# Allegro board democ2.brd
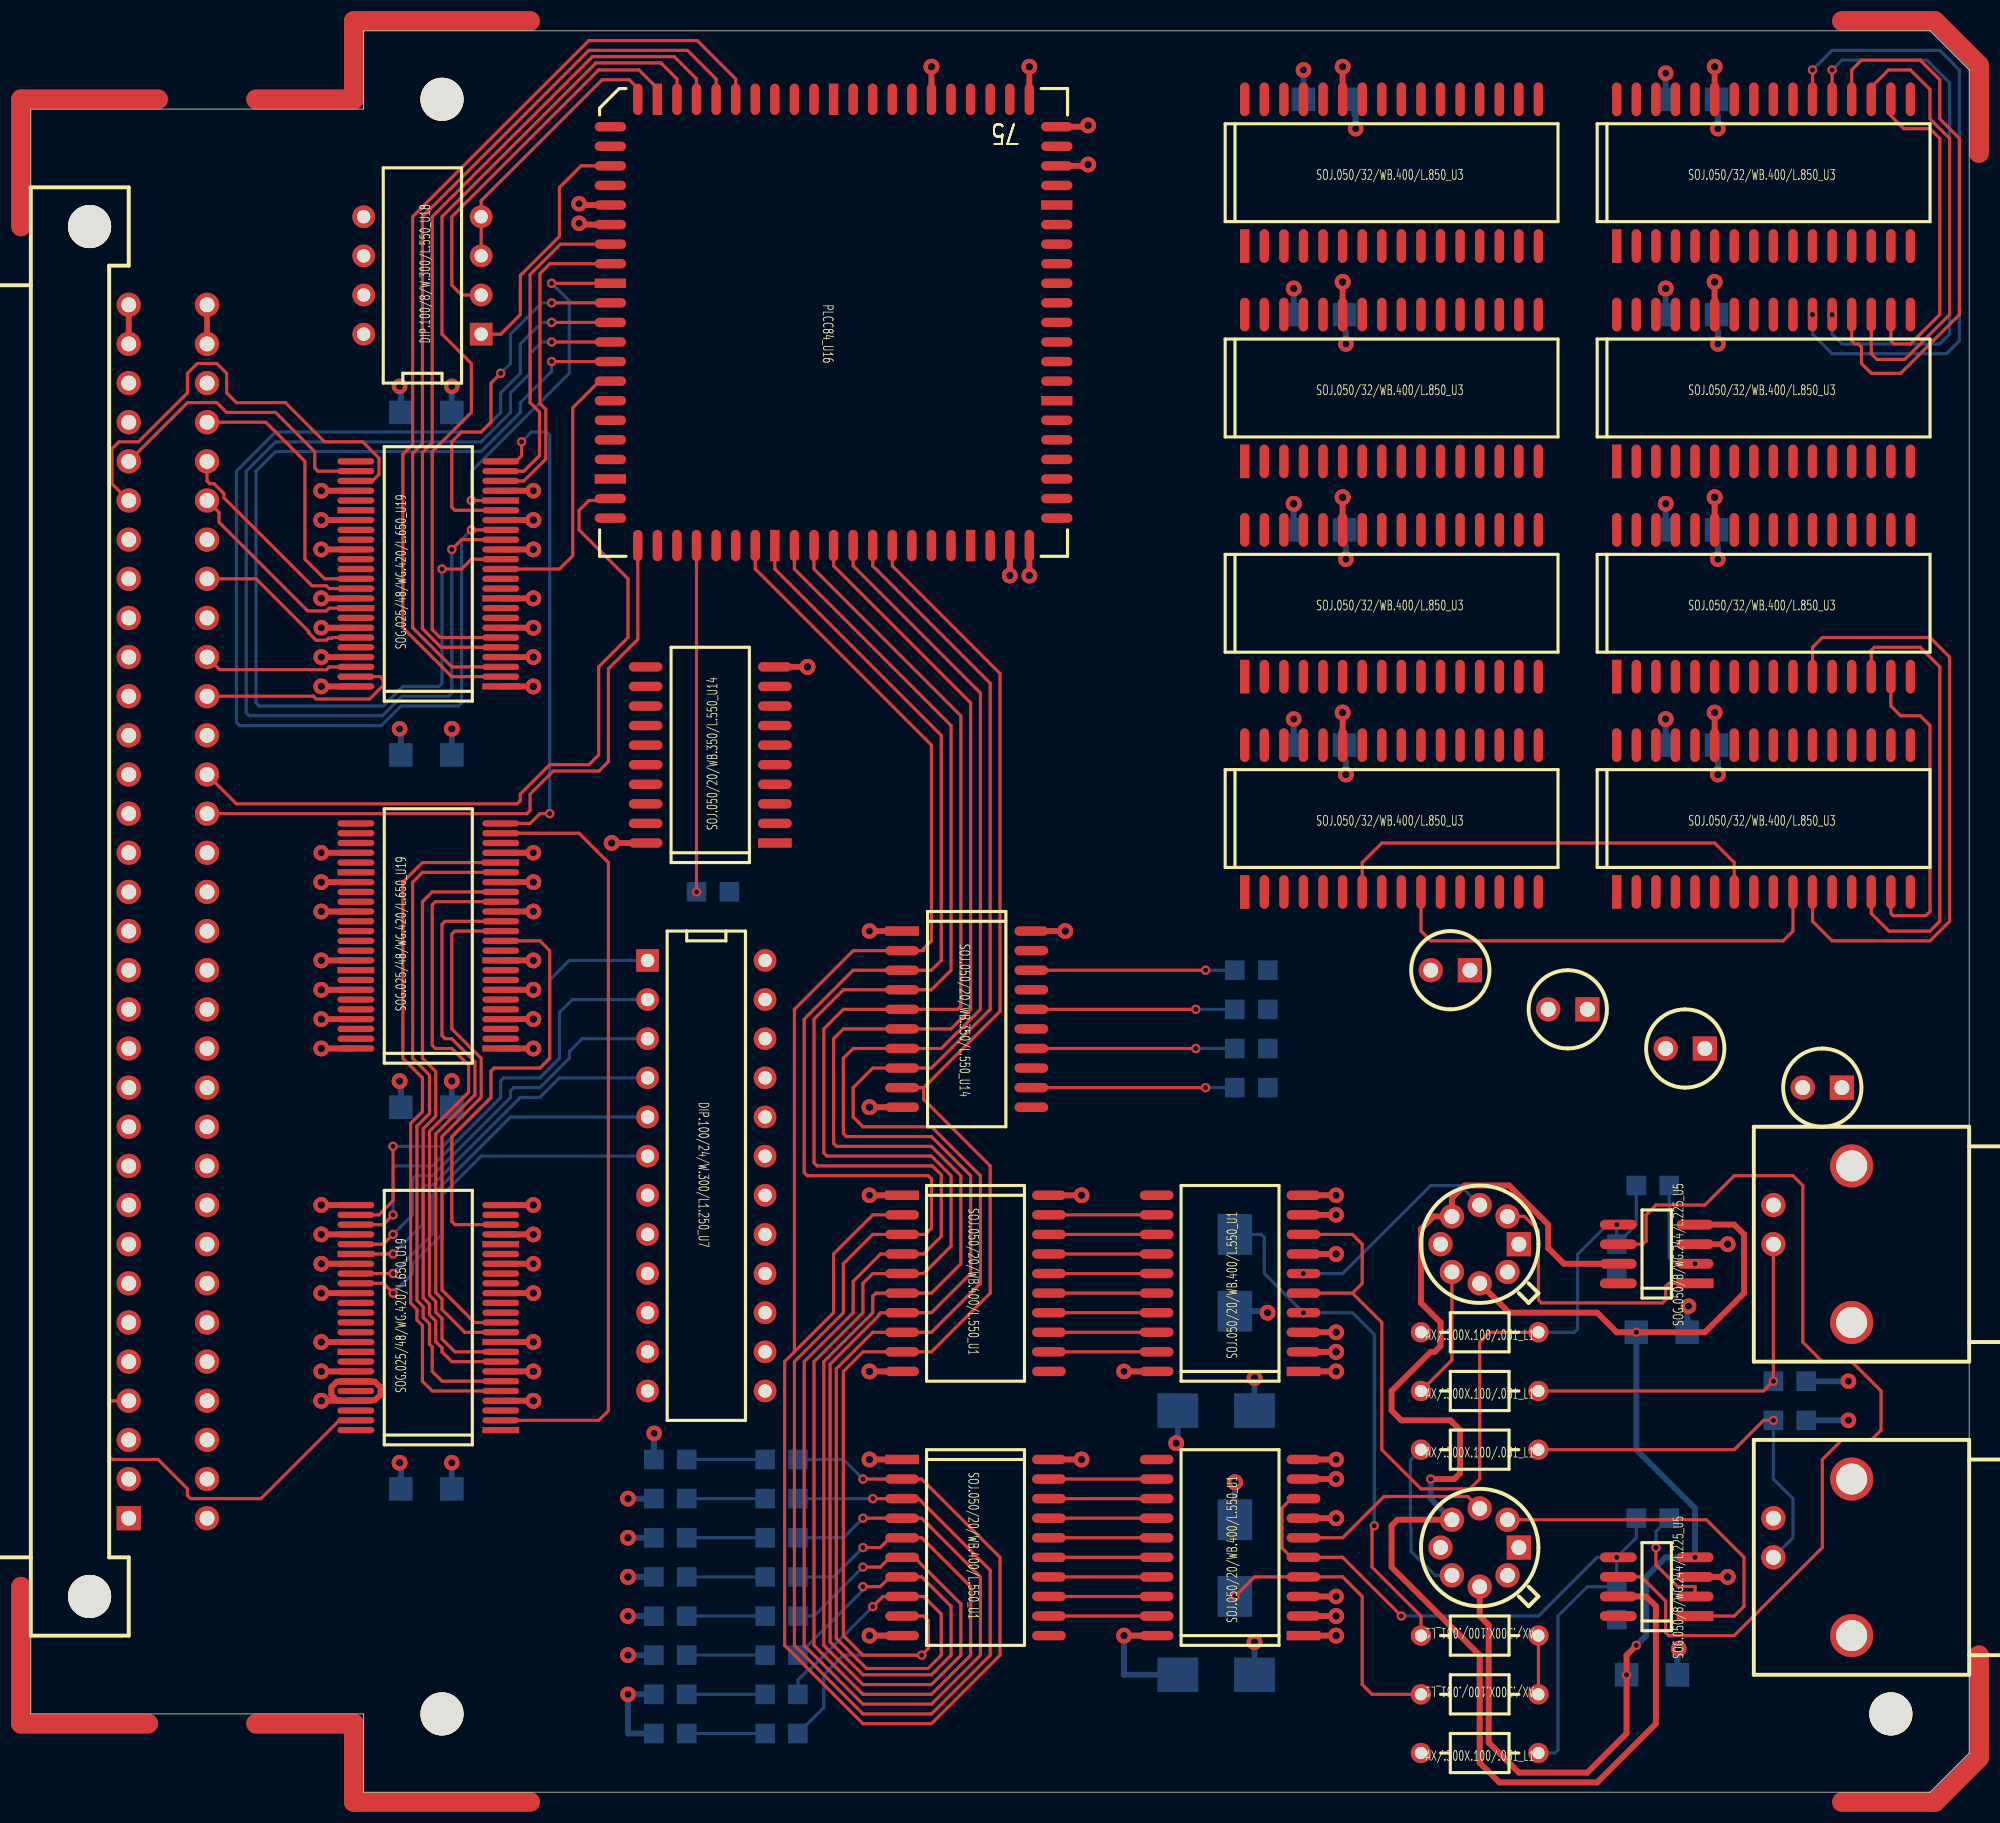
[diagram p0: board, top side]
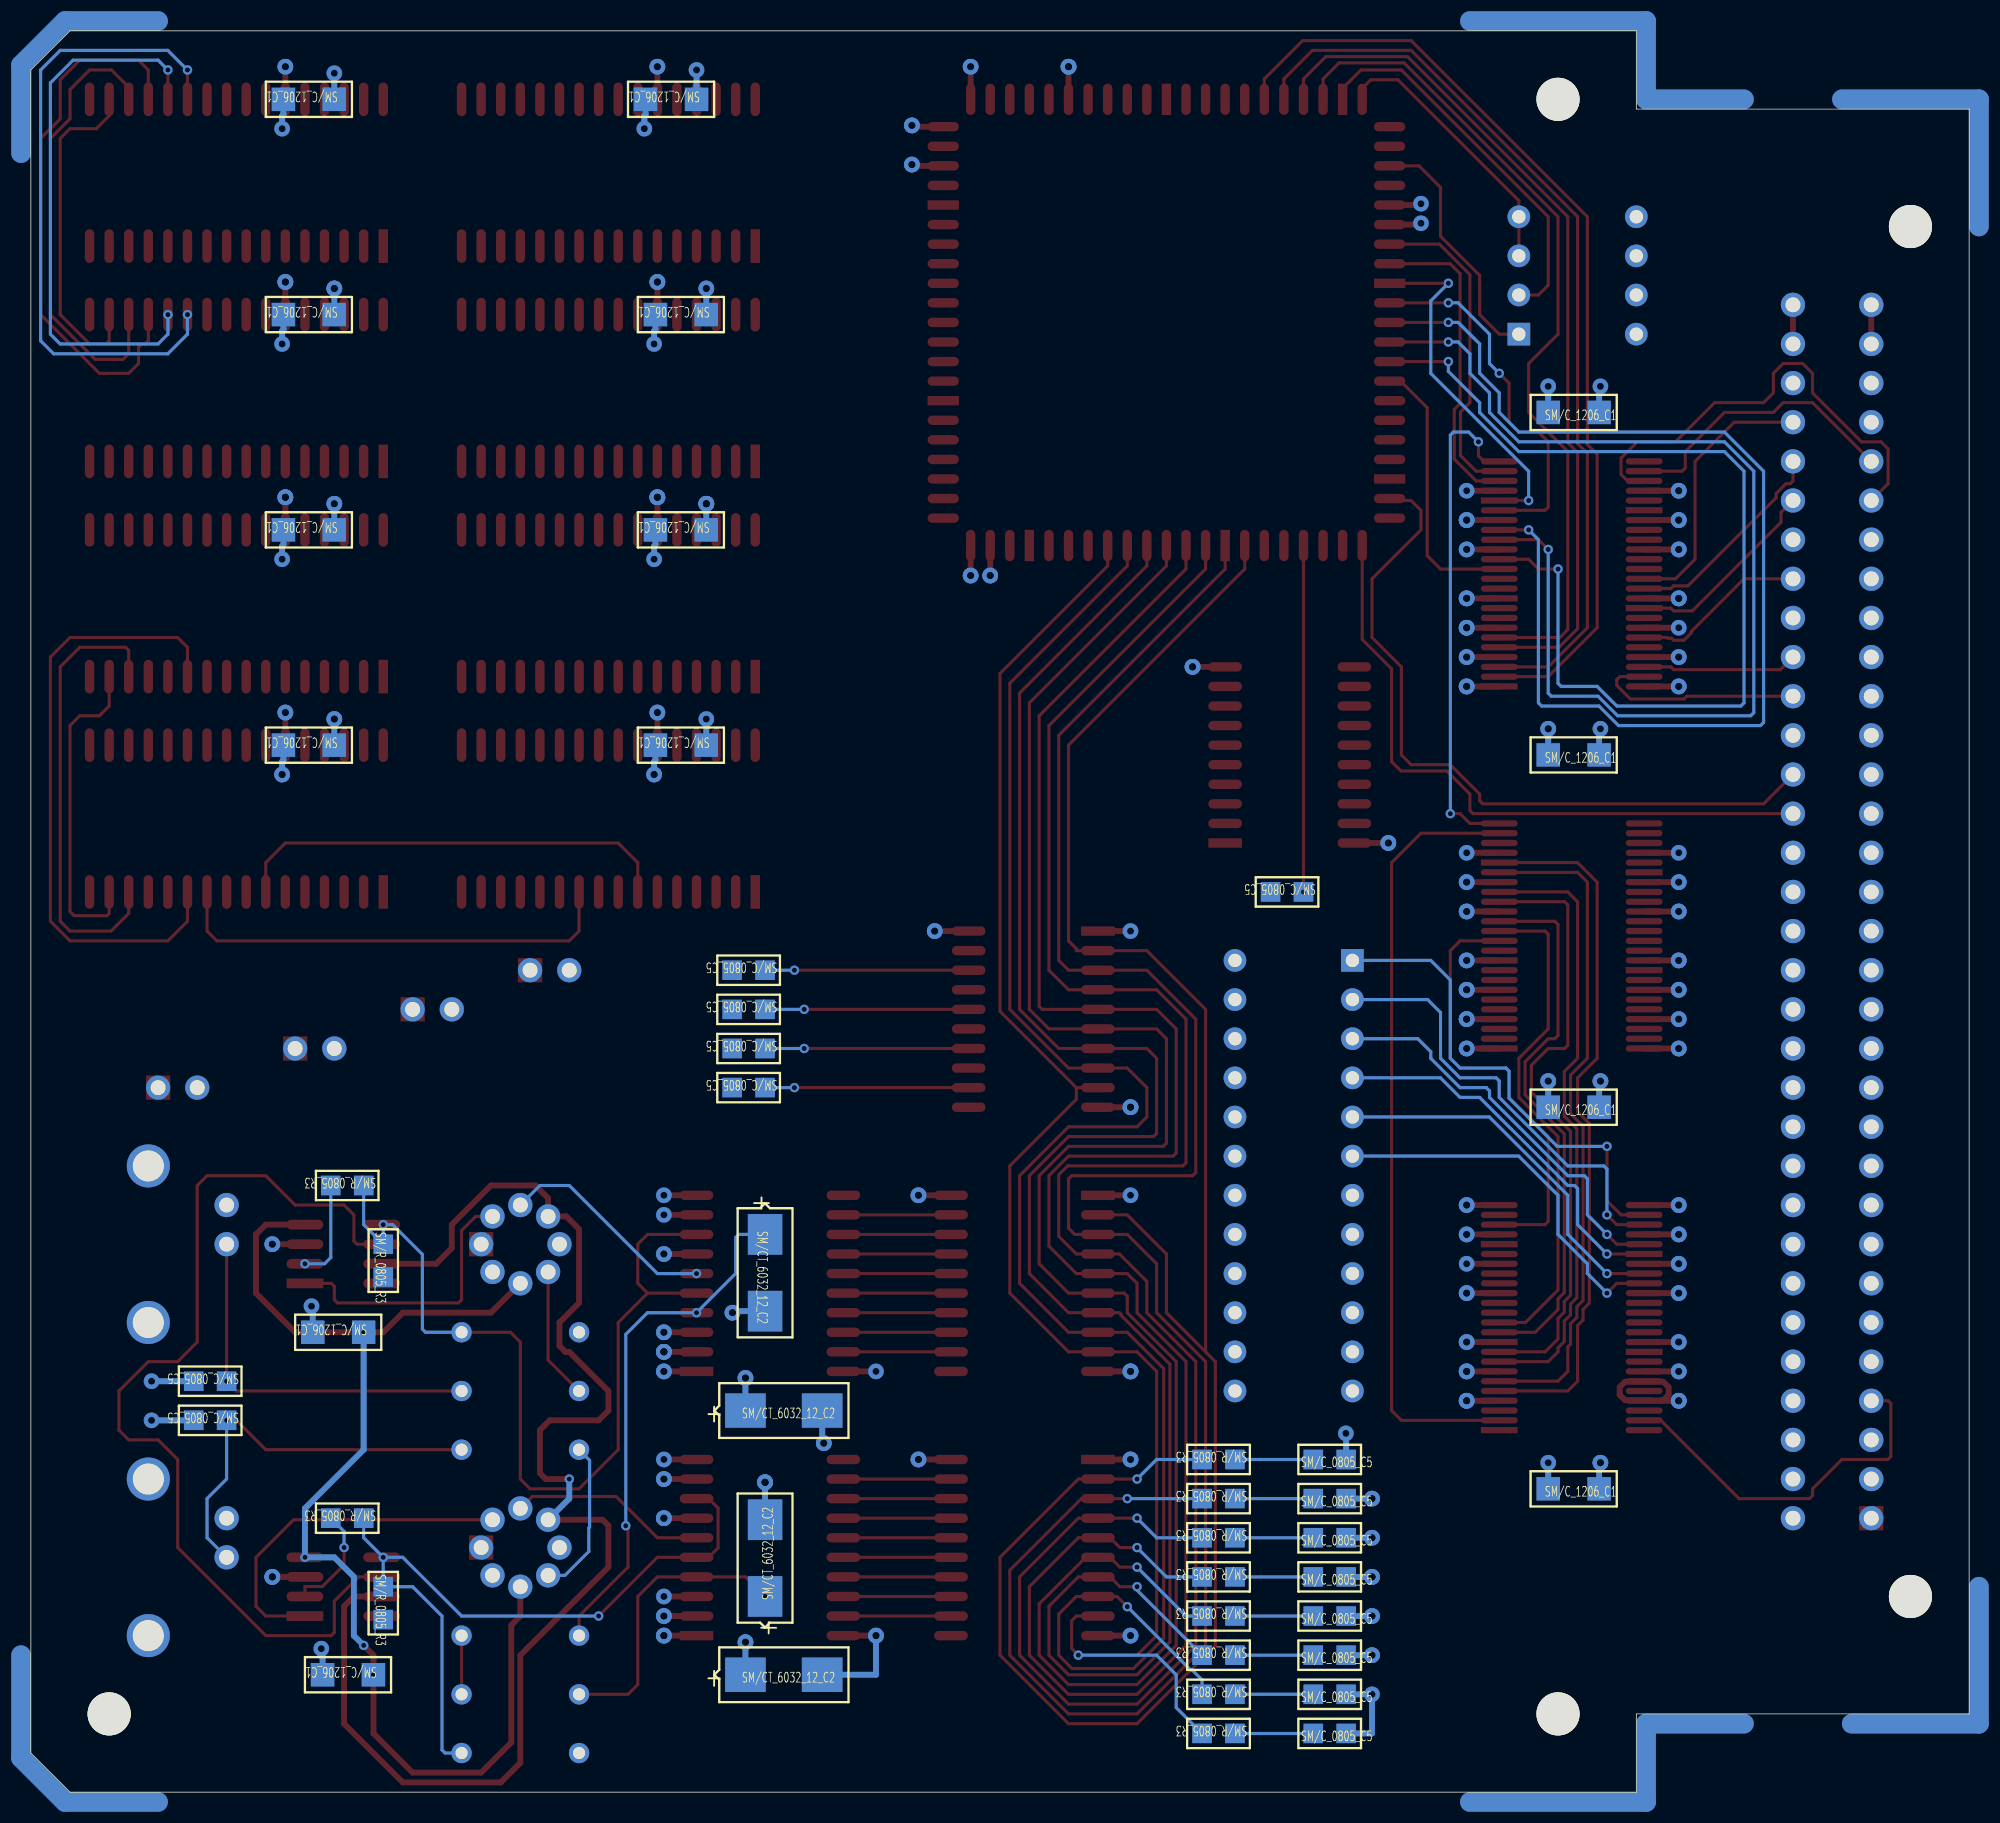
[diagram p1: board, bottom side, seen from below]

Outline 125.73 x 114.3 mm; copper layers: TOP, GND, POWER, BOTTOM. Coordinates in mm from the lower left corner of the outline.
Outline path: 0,109.22 21.59,109.22 21.59,114.3 123.19,114.3 125.73,111.76 125.73,2.54 123.19,0 21.59,0 21.59,5.08 0,5.08 0,109.22

## Design rules (mm)
nets with their own width: min track width 0.203; nets A0 A1 A2 A3 A4 A5 A6 A7 A8 A9 A10 A11 A12 A13 A14 A15 A16 A17 A18 A19 A20 A21 A22 A23 AEN/ BA0 BA1 BA2 BA3 BD0 BD1 BD2 BD3 BD4 BD5 BD6 BD7 BD8 BD9 BD10 BD11 BD12 BD13 BD14 BD15 BRD/ BRESET BWR/ D0 D1 D2 D3 D4 D5 D6 D7 D9 D10 D11 D12 D13 D14 D15 DDIR DEN/ DHEN/ FPGA/ GAIN HS/ MCLK MRD/ MWR/ N00036 N00036_6360 N00038 N00038_6372 N00044 N00044_6366 N00046 N00046_6362 N00048 N00048_6359 N00060 N00060_6368 N00306 N00318 N00322 N00671 N00689 N00703 N00717 N00827 N00831 N00835 N00837 N04966 N05690 N05692 N05694 N05696 N05698 N05700 N05702 N05704 N11940 N11950 N11984 N11994 N12004 N19706 N19710 N19714 N19718 N19934 N19938 N19942 N23417 N23878 N24816 N24821 N24826 N84247 N103899 N255822 N314771 N315146 N315333 N320476 N336036 N336041 OUTA OUTC RA0 RA1 RA2 RA3 RA4 RA5 RA6 RA7 RA8 RA9 RA10 RA11 RA12 RA13 RA14 RA15 RD0 RD1 RD2 RD3 RD4 RD5 RD6 RD7 RDY/ RESET/ SEL VCLKA VCLKC VD0 VD1 VD2 VD3 VD4 VD5 VD6 VD7 WAIT/ WSTAT/
nets with their own width: min track width 0.381; nets AGND GND GND_EARTH V12N V+12 VCC

## Placement (name value [footprint] x y rotation side)
C1  .1UF  [SMC1206]  104.14 29.84 0 bottom
C2  .1UF  [SMCT603212]  79.38 24.77 180 bottom
C3  .1UF  [SMCT603212]  79.38 7.62 180 bottom
C4  .1UF  [SMC1206]  106.05 109.86 0 bottom
C5  3300  [SMC0805]  42.55 6.35 180 bottom
C6  .1UF  [SMC1206]  103.51 7.62 0 bottom
C7  3300  [SMC0805]  42.55 21.59 180 bottom
C8  3300  [SMC0805]  42.55 8.89 180 bottom
C9  .1UF  [SMC1206]  27.3 89.53 180 bottom
C10  .1UF  [SMC1206]  27.3 67.31 180 bottom
C11  .1UF  [SMC1206]  27.3 44.45 180 bottom
C12  .1UF  [SMC1206]  106.05 81.91 0 bottom
C13  .1UF  [SMC1206]  106.05 95.89 0 bottom
C14  .1UF  [SMC1206]  106.05 67.95 0 bottom
C15  .1UF  [SMC1206]  27.3 19.69 180 bottom
C16  3300  [SMC0805]  42.55 11.43 180 bottom
C17  3300  [SMC0805]  42.55 13.97 180 bottom
C18  47PF  [SMC0805]  113.03 26.67 0 bottom
C19  3300  [SMC0805]  42.55 3.81 180 bottom
C20  3300  [SMC0805]  42.55 16.51 180 bottom
C21  .1UF  [SMCT603212]  78.11 12.7 90 bottom
C22  .1UF  [SMCT603212]  78.11 36.2 270 bottom
C23  47PF  [SMC0805]  113.03 24.13 0 bottom
C24  3300  [SMC0805]  42.55 19.05 180 bottom
C25  .1UF  [SMC1206]  82.55 109.86 0 bottom
C26  .1UF  [SMC1206]  81.92 95.89 0 bottom
C27  .1UF  [SMC1206]  81.92 81.91 0 bottom
C28  .1UF  [SMC1206]  81.92 67.95 0 bottom
D1  DIODE PHOTO EMIT  [LED]  100.97 50.8 180 top
D2  DIODE PHOTO EMIT  [LED]  93.34 53.34 180 top
D3  DIODE PHOTO EMIT  [LED]  108.59 48.26 180 top
D4  DIODE PHOTO EMIT  [LED]  117.48 45.72 180 top
J1  CON PAD  [DIN64P]  6.35 17.78 90 top
J2  CHANNEL 1  [BNC2P]  113.03 15.24 270 top
J3  CHANNEL 2  [BNC2P]  113.03 35.56 270 top
L1  50  [AX300X100031]  90.17 22.23 0 top
L2  50  [AX300X100031]  90.17 29.84 0 top
L3  50  [AX300X100031]  97.79 6.35 180 top
L4  50  [AX300X100031]  90.17 26.03 0 top
L5  50  [AX300X100031]  97.79 10.16 180 top
L6  50  [AX300X100031]  90.17 2.54 0 top
MTH1  -  [MTHOLE1]  26.67 109.86 0 top
MTH2  -  [MTHOLE1]  26.67 5.08 0 top
MTH3  -  [MTHOLE1]  120.65 5.08 0 top
R1  150  [SMC0805]  78.11 53.34 0 bottom
R2  150  [SMC0805]  78.11 50.8 0 bottom
R3  100  [SMR0805]  104.14 17.78 0 bottom
R4  100  [SMR0805]  102.87 13.34 270 bottom
R5  100  [SMR0805]  102.87 35.56 270 bottom
R6  100  [SMR0805]  104.14 39.37 0 bottom
R7  50  [SMR0805]  47.62 21.59 0 bottom
R8  50  [SMR0805]  47.62 8.89 0 bottom
R9  50  [SMR0805]  47.62 11.43 0 bottom
R10  50  [SMR0805]  47.62 6.35 0 bottom
R11  50  [SMC0805]  43.18 58.42 0 bottom
R12  150  [SMC0805]  78.11 45.72 0 bottom
R13  50  [SMR0805]  47.62 19.05 0 bottom
R14  50  [SMR0805]  47.62 16.51 0 bottom
R15  50  [SMR0805]  47.62 13.97 0 bottom
R16  50  [SMR0805]  47.62 3.81 0 bottom
R17  150  [SMC0805]  78.11 48.26 0 bottom
U1  TLC5602A  [SOJ05020WB400L550]  82.55 10.16 90 top
U2  TLC5602A  [SOJ05020WB400L550]  82.55 27.3 90 top
U3  TC55B4257J  [SOJ05032WB400L850]  102.87 86.36 0 top
U4  TC55B4257J  [SOJ05032WB400L850]  102.87 100.33 0 top
U5  DG419A  [SOG0508WG244L225]  107.95 33.02 90 top
U6  DG419A  [SOG0508WG244L225]  107.95 11.43 90 top
U7  20L10  [DIP10024W300L1250]  40 53.98 270 top
U8  TC55B4257J  [SOJ05032WB400L850]  78.74 72.39 0 top
U9  TC55B4257J  [SOJ05032WB400L850]  78.74 100.33 0 top
U10  TC55B4257J  [SOJ05032WB400L850]  102.87 72.39 0 top
U11  TC55B4257J  [SOJ05032WB400L850]  102.87 58.42 0 top
U12  TC55B4257J  [SOJ05032WB400L850]  78.74 58.42 0 top
U13  TC55B4257J  [SOJ05032WB400L850]  78.74 86.36 0 top
U14  ACT574  [SOJ05020WB350L550]  56.52 55.88 270 top
U15  ACT574  [SOJ05020WB400L550]  56.52 21.59 270 top
U16  EPF8282  [PLCC84]  52.07 109.86 270 top
U17  ACT574  [SOJ05020WB400L550]  56.52 38.73 270 top
U18  EPC1064  [DIP1008W300L550]  29.21 94.61 90 top
U19  FCT16245  [SOG02548WG420L650]  30.48 71.75 90 top
U20  FCT16245  [SOG02548WG420L650]  30.48 23.49 90 top
U21  FCT16245  [SOG02548WG420L650]  30.48 48.26 90 top
U22  TLE2037A  [TO-99]  96.52 35.56 90 top
U23  TLE2037A  [TO-99]  96.52 15.88 90 top
U25  74ACT574  [SOJ05020WB350L550]  48.26 61.59 90 top

## Library data of the parts
C1-C3 C5-C8 C16 C17 C19-C22 C24 = CAP: alternate symbols: (SMCT603212;SMC0805)
C4 C9-C15 C25-C28 = CAP_NP
C18 C23 = CAPACITOR
D1-D4 = DIODE_PHOTO_EMIT
J1 = 64CONSEPPINS
J2 J3 = BNC
L1-L6 = INDUCTOR
MTH1-MTH3 = MTHOLE1
R1-R17 = R: alternate symbols: (SMR0805)
U1 U2 = TLC5602A
U3 U4 U8-U13 = TC56B4257J
U5 U6 = DG419A
U7 = 20L10
U14 U15 U17 = ACT574: alternate symbols: (SOJ05020WB400L550)
U16 = FPGA_0
U18 = EPC1064
U19-U21 = FCT16245
U22 U23 = TLE2037A
U25 = 74ACT574

## Footprints (pads in the part's own frame, mm; a bottom-side part is the same pattern mirrored in y, then rotated)
AX300X100031
  round 1.321 hole 0.787: 1(0,0) 2(7.62,0)
BNC2P
  round 1.575 hole 0.965: 1(0,0) 2(-2.54,0)
  round 2.794 hole 2.007: 3(5.08,5.08) 4(-5.08,5.08)
DIN64P
  rect 1.575x1.575 hole 0.965: 1(0,0)
  round 1.575 hole 0.965: 2(2.54,0) 3(5.08,0) 4(7.62,0) 5(10.16,0) 6(12.7,0) 7(15.24,0) 8(17.78,0) 9(20.32,0) 10(22.86,0) 11(25.4,0) 12(27.94,0) 13(30.48,0) 14(33.02,0) 15(35.56,0) 16(38.1,0) 17(40.64,0) 18(43.18,0) 19(45.72,0) 20(48.26,0) 21(50.8,0) 22(53.34,0) 23(55.88,0) 24(58.42,0) 25(60.96,0) 26(63.5,0) 27(66.04,0) 28(68.58,0) 29(71.12,0) 30(73.66,0) 31(76.2,0) 32(78.74,0) 33(0,-5.08) 34(2.54,-5.08) 35(5.08,-5.08) 36(7.62,-5.08) 37(10.16,-5.08) 38(12.7,-5.08) 39(15.24,-5.08) 40(17.78,-5.08) 41(20.32,-5.08) 42(22.86,-5.08) 43(25.4,-5.08) 44(27.94,-5.08) 45(30.48,-5.08) 46(33.02,-5.08) 47(35.56,-5.08) 48(38.1,-5.08) 49(40.64,-5.08) 50(43.18,-5.08) 51(45.72,-5.08) 52(48.26,-5.08) 53(50.8,-5.08) 54(53.34,-5.08) 55(55.88,-5.08) 56(58.42,-5.08) 57(60.96,-5.08) 58(63.5,-5.08) 59(66.04,-5.08) 60(68.58,-5.08) 61(71.12,-5.08) 62(73.66,-5.08) 63(76.2,-5.08) 64(78.74,-5.08)
  round 2.794 hole 2.794: 65(83.82,2.54) 66(-5.08,2.54)
DIP1008W300L550
  rect 1.473x1.473 hole 0.864: 1(0,0)
  round 1.473 hole 0.864: 2(2.54,0) 3(5.08,0) 4(7.62,0) 5(7.62,7.62) 6(5.08,7.62) 7(2.54,7.62) 8(0,7.62)
DIP10024W300L1250
  rect 1.473x1.473 hole 0.864: 1(0,0)
  round 1.473 hole 0.864: 2(2.54,0) 3(5.08,0) 4(7.62,0) 5(10.16,0) 6(12.7,0) 7(15.24,0) 8(17.78,0) 9(20.32,0) 10(22.86,0) 11(25.4,0) 12(27.94,0) 13(27.94,7.62) 14(25.4,7.62) 15(22.86,7.62) 16(20.32,7.62) 17(17.78,7.62) 18(15.24,7.62) 19(12.7,7.62) 20(10.16,7.62) 21(7.62,7.62) 22(5.08,7.62) 23(2.54,7.62) 24(0,7.62)
LED
  rect 1.575x1.575 hole 0.965: 1(0,0)
  round 1.575 hole 0.965: 2(2.54,0)
MTHOLE1
  round 2.794 hole 2.794: 1(0,0)
PLCC84
  rect 2.032x0.61 smd: 1(0,0) 10(0,-11.43) 40(28.956,-3.81) 50(28.956,8.89)
  oval 2.032x0.61 smd: 2(0,-1.27) 3(0,-2.54) 4(0,-3.81) 5(0,-5.08) 6(0,-6.35) 7(0,-7.62) 8(0,-8.89) 9(0,-10.16) 11(0,-12.7) 33(28.956,-12.7) 34(28.956,-11.43) 35(28.956,-10.16) 36(28.956,-8.89) 37(28.956,-7.62) 38(28.956,-6.35) 39(28.956,-5.08) 41(28.956,-2.54) 42(28.956,-1.27) 43(28.956,0) 44(28.956,1.27) 45(28.956,2.54) 46(28.956,3.81) 47(28.956,5.08) 48(28.956,6.35) 49(28.956,7.62) 51(28.956,10.16) 52(28.956,11.43) 53(28.956,12.7) 75(0,12.7) 76(0,11.43) 77(0,10.16) 78(0,8.89) 79(0,7.62) 80(0,6.35) 81(0,5.08) 82(0,3.81) 83(0,2.54) 84(0,1.27)
  oval 0.61x2.032 smd: 12(1.778,-14.478) 13(3.048,-14.478) 14(4.318,-14.478) 15(5.588,-14.478) 16(6.858,-14.478) 17(8.128,-14.478) 18(9.398,-14.478) 19(10.668,-14.478) 21(13.208,-14.478) 22(14.478,-14.478) 23(15.748,-14.478) 24(17.018,-14.478) 25(18.288,-14.478) 26(19.558,-14.478) 27(20.828,-14.478) 28(22.098,-14.478) 29(23.368,-14.478) 31(25.908,-14.478) 32(27.178,-14.478) 54(27.178,14.478) 55(25.908,14.478) 56(24.638,14.478) 57(23.368,14.478) 58(22.098,14.478) 59(20.828,14.478) 61(18.288,14.478) 62(17.018,14.478) 63(15.748,14.478) 64(14.478,14.478) 65(13.208,14.478) 66(11.938,14.478) 67(10.668,14.478) 68(9.398,14.478) 69(8.128,14.478) 71(5.588,14.478) 72(4.318,14.478) 73(3.048,14.478) 74(1.778,14.478)
  rect 0.61x2.032 smd: 20(11.938,-14.478) 30(24.638,-14.478) 60(19.558,14.478) 70(6.858,14.478)
SMC0805
  rect 1.27x1.27 smd: 1(0,0) 2(2.134,0)
SMC1206
  rect 1.524x1.524 smd: 1(0,0) 2(3.302,0)
SMCT603212
  rect 2.642x2.235 smd: 1(0,0) 2(4.978,0)
SMR0805
  rect 1.27x1.27 smd: 1(0,0) 2(2.134,0)
SOG0508WG244L225
  rect 0.635x2.388 smd: 1(0,0)
  oval 0.635x2.388 smd: 2(1.27,0) 3(2.54,0) 4(3.81,0) 5(3.81,4.978) 6(2.54,4.978) 7(1.27,4.978) 8(0,4.978)
SOG02548WG420L650
  rect 0.406x2.388 smd: 1(0,0) 10(5.715,0) 20(12.065,0) 30(11.43,9.398) 40(5.08,9.398)
  oval 0.406x2.388 smd: 2(0.635,0) 3(1.27,0) 4(1.905,0) 5(2.54,0) 6(3.175,0) 7(3.81,0) 8(4.445,0) 9(5.08,0) 11(6.35,0) 12(6.985,0) 13(7.62,0) 14(8.255,0) 15(8.89,0) 16(9.525,0) 17(10.16,0) 18(10.795,0) 19(11.43,0) 21(12.7,0) 22(13.335,0) 23(13.97,0) 24(14.605,0) 25(14.605,9.398) 26(13.97,9.398) 27(13.335,9.398) 28(12.7,9.398) 29(12.065,9.398) 31(10.795,9.398) 32(10.16,9.398) 33(9.525,9.398) 34(8.89,9.398) 35(8.255,9.398) 36(7.62,9.398) 37(6.985,9.398) 38(6.35,9.398) 39(5.715,9.398) 41(4.445,9.398) 42(3.81,9.398) 43(3.175,9.398) 44(2.54,9.398) 45(1.905,9.398) 46(1.27,9.398) 47(0.635,9.398) 48(0,9.398)
SOJ05020WB350L550
  rect 0.61x2.184 smd: 1(0,0)
  oval 0.61x2.184 smd: 2(1.27,0) 3(2.54,0) 4(3.81,0) 5(5.08,0) 6(6.35,0) 7(7.62,0) 8(8.89,0) 9(10.16,0) 10(11.43,0) 11(11.43,8.382) 12(10.16,8.382) 13(8.89,8.382) 14(7.62,8.382) 15(6.35,8.382) 16(5.08,8.382) 17(3.81,8.382) 18(2.54,8.382) 19(1.27,8.382) 20(0,8.382)
SOJ05020WB400L550
  rect 0.61x2.184 smd: 1(0,0)
  oval 0.61x2.184 smd: 2(1.27,0) 3(2.54,0) 4(3.81,0) 5(5.08,0) 6(6.35,0) 7(7.62,0) 8(8.89,0) 9(10.16,0) 10(11.43,0) 11(11.43,9.525) 12(10.16,9.525) 13(8.89,9.525) 14(7.62,9.525) 15(6.35,9.525) 16(5.08,9.525) 17(3.81,9.525) 18(2.54,9.525) 19(1.27,9.525) 20(0,9.525)
SOJ05032WB400L850
  rect 0.61x2.184 smd: 1(0,0)
  oval 0.61x2.184 smd: 2(1.27,0) 3(2.54,0) 4(3.81,0) 5(5.08,0) 6(6.35,0) 7(7.62,0) 8(8.89,0) 9(10.16,0) 10(11.43,0) 11(12.7,0) 12(13.97,0) 13(15.24,0) 14(16.51,0) 15(17.78,0) 16(19.05,0) 17(19.05,9.525) 18(17.78,9.525) 19(16.51,9.525) 20(15.24,9.525) 21(13.97,9.525) 22(12.7,9.525) 23(11.43,9.525) 24(10.16,9.525) 25(8.89,9.525) 26(7.62,9.525) 27(6.35,9.525) 28(5.08,9.525) 29(3.81,9.525) 30(2.54,9.525) 31(1.27,9.525) 32(0,9.525)
TO-99
  rect 1.575x1.575 hole 0.965: 1(0,0)
  round 1.575 hole 0.965: 2(1.803,0.737) 3(2.54,2.54) 4(1.803,4.343) 5(0,5.08) 6(-1.803,4.343) 7(-2.54,2.54) 8(-1.803,0.737)

## Nets
AGND: C1.2(TP-2) C6.2(TP-2) C21.2(TP-2) C22.2(TP-2) J1.1(TP-1) J1.2(TP-2) J1.33(TP-33) U1.3(TP-3) U1.7(TP-7) U1.10(TP-10) U2.3(TP-3) U2.7(TP-7) U2.10(TP-10) U5.3(TP-3) U6.3(TP-3)
GND: C2.2(TP-2) C3.2(TP-2) C4.2(TP-2) C5.2(TP-2) C7.2(TP-2) C8.2(TP-2) C9.2(TP-2) C10.2(TP-2) C11.2(TP-2) C12.2(TP-2) C13.2(TP-2) C14.2(TP-2) C15.2(TP-2) C16.2(TP-2) C17.2(TP-2) C19.2(TP-2) C20.2(TP-2) C24.2(TP-2) C25.2(TP-2) C26.2(TP-2) C27.2(TP-2) C28.2(TP-2) J1.3(TP-3) J1.34(TP-34) J1.35(TP-35) J1.36(TP-36) U1.1(TP-1) U1.20(TP-20) U2.1(TP-1) U2.20(TP-20) U3.27(TP-27) U4.27(TP-27) U7.11(TP-11) U7.12(TP-12) U7.13(TP-13) U8.27(TP-27) U9.27(TP-27) U10.27(TP-27) U11.27(TP-27) U12.27(TP-27) U13.27(TP-27) U14.1(TP-1) U14.10(TP-10) U15.1(TP-1) U15.10(TP-10) U16.17(TP-17) U16.53(TP-53) U16.74(TP-74) U16.75(TP-75) U17.1(TP-1) U17.10(TP-10) U19.1(TP-1) U19.4(TP-4) U19.10(TP-10) U19.15(TP-15) U19.21(TP-21) U19.28(TP-28) U19.34(TP-34) U19.39(TP-39) U19.45(TP-45) U19.48(TP-48) U20.4(TP-4) U20.10(TP-10) U20.15(TP-15) U20.21(TP-21) U20.24(TP-24) U20.25(TP-25) U20.28(TP-28) U20.34(TP-34) U20.39(TP-39) U20.45(TP-45) U21.1(TP-1) U21.4(TP-4) U21.10(TP-10) U21.15(TP-15) U21.21(TP-21) U21.28(TP-28) U21.34(TP-34) U21.39(TP-39) U21.45(TP-45) U21.48(TP-48) U25.10(TP-10)
GND_EARTH: C18.2(TP-2) C23.2(TP-2) J2.2(TP-2) J3.2(TP-2)
V12N: J1.31(TP-31) J1.32(TP-32) U5.7(TP-7) U6.7(TP-7) U22.4(TP-4) U23.4(TP-4)
VCC: C2.1(TP-1) C3.1(TP-1) C4.1(TP-1) C9.1(TP-1) C10.1(TP-1) C11.1(TP-1) C12.1(TP-1) C13.1(TP-1) C14.1(TP-1) C15.1(TP-1) C25.1(TP-1) C26.1(TP-1) C27.1(TP-1) C28.1(TP-1) D1.1(TP-1) D2.1(TP-1) D3.1(TP-1) D4.1(TP-1) J1.29(TP-29) J1.30(TP-30) J1.62(TP-62) L2.1(TP-1) L6.1(TP-1) U1.2(TP-2) U1.9(TP-9) U2.2(TP-2) U2.9(TP-9) U7.24(TP-24) U14.20(TP-20) U15.20(TP-20) U16.16(TP-16) U16.52(TP-52) U16.72(TP-72) U16.80(TP-80) U17.20(TP-20) U19.7(TP-7) U19.18(TP-18) U19.31(TP-31) U19.42(TP-42) U20.7(TP-7) U20.18(TP-18) U20.31(TP-31) U20.42(TP-42) U21.7(TP-7) U21.18(TP-18) U21.31(TP-31) U21.42(TP-42) U25.20(TP-20)
A0: J1.54(TP-54) U19.47(TP-47)
A1: J1.55(TP-55) U19.46(TP-46)
A2: J1.56(TP-56) U19.44(TP-44)
A3: J1.57(TP-57) U19.43(TP-43)
A4: J1.58(TP-58) U19.41(TP-41)
A5: J1.59(TP-59) U19.40(TP-40)
A6: J1.60(TP-60) U19.38(TP-38)
A7: J1.61(TP-61) U19.37(TP-37)
A8: J1.13(TP-13) U21.47(TP-47)
A9: J1.14(TP-14) U21.46(TP-46)
A10: J1.15(TP-15) U21.44(TP-44)
A11: J1.16(TP-16) U21.43(TP-43)
A12: J1.17(TP-17) U21.41(TP-41)
A13: J1.18(TP-18) U21.40(TP-40)
A14: J1.19(TP-19) U21.38(TP-38)
A15: J1.20(TP-20) U21.37(TP-37)
A16: J1.37(TP-37) U20.36(TP-36)
A17: J1.38(TP-38) U20.35(TP-35)
A18: J1.39(TP-39) U7.6(TP-6) U20.33(TP-33)
A19: J1.40(TP-40) U7.5(TP-5) U20.32(TP-32)
A20: J1.41(TP-41) U7.4(TP-4) U20.30(TP-30)
A21: J1.42(TP-42) U7.3(TP-3) U20.29(TP-29)
A22: J1.43(TP-43) U7.2(TP-2) U20.27(TP-27)
A23: J1.44(TP-44) U7.1(TP-1) U20.26(TP-26)
AEN/: J1.47(TP-47) U7.8(TP-8)
BA0: U16.6(TP-6) U19.2(TP-2) U20.13(TP-13) U21.2(TP-2)
BA1: U16.7(TP-7) U19.3(TP-3) U20.14(TP-14) U21.3(TP-3)
BA2: U16.8(TP-8) U19.5(TP-5) U20.16(TP-16) U21.5(TP-5)
BA3: U16.9(TP-9) U19.6(TP-6) U20.17(TP-17) U21.6(TP-6)
BD0: U16.25(TP-25) U19.13(TP-13)
BD1: U16.24(TP-24) U19.14(TP-14)
BD2: U16.23(TP-23) U19.16(TP-16)
BD3: U16.22(TP-22) U19.17(TP-17)
BD4: U16.21(TP-21) U19.19(TP-19)
BD5: U16.20(TP-20) U19.20(TP-20)
BD6: U16.19(TP-19) U19.22(TP-22)
BD7: U16.18(TP-18) U19.23(TP-23)
BD8: U20.2(TP-2) U21.23(TP-23)
BD9: U20.3(TP-3) U21.22(TP-22)
BD10: U20.5(TP-5) U21.20(TP-20)
BD11: U20.6(TP-6) U21.19(TP-19)
BD12: U20.8(TP-8) U21.17(TP-17)
BD13: U20.9(TP-9) U21.16(TP-16)
BD14: U20.11(TP-11) U21.14(TP-14)
BD15: U20.12(TP-12) U21.13(TP-13)
BRD/: U7.15(TP-15) U16.73(TP-73)
BRESET: U7.14(TP-14) U16.12(TP-12)
BWR/: U7.16(TP-16) U16.54(TP-54)
D0: J1.28(TP-28) U19.26(TP-26) U21.26(TP-26)
D1: J1.27(TP-27) U19.27(TP-27) U21.27(TP-27)
D2: J1.26(TP-26) U19.29(TP-29) U21.29(TP-29)
D3: J1.25(TP-25) U19.30(TP-30) U21.30(TP-30)
D4: J1.24(TP-24) U19.32(TP-32) U21.32(TP-32)
D5: J1.23(TP-23) U19.33(TP-33) U21.33(TP-33)
D6: J1.4(TP-4) J1.22(TP-22) U19.35(TP-35) U20.47(TP-47) U21.35(TP-35)
D7: J1.21(TP-21) U19.36(TP-36) U21.36(TP-36)
D9: J1.5(TP-5) U20.46(TP-46)
D10: J1.6(TP-6) U20.44(TP-44)
D11: J1.7(TP-7) U20.43(TP-43)
D12: J1.8(TP-8) U20.41(TP-41)
D13: J1.9(TP-9) U20.40(TP-40)
D14: J1.10(TP-10) U20.38(TP-38)
D15: J1.11(TP-11) U20.37(TP-37)
DDIR: U7.19(TP-19) U19.24(TP-24) U20.1(TP-1) U21.24(TP-24)
DEN/: U7.20(TP-20) U19.25(TP-25) U20.48(TP-48)
DHEN/: U7.21(TP-21) U21.25(TP-25)
FPGA/: U7.17(TP-17) U16.30(TP-30)
GAIN: U5.6(TP-6) U6.6(TP-6) U16.28(TP-28)
HS/: U7.18(TP-18) U16.29(TP-29)
MCLK: J1.52(TP-52) U16.31(TP-31)
MRD/: J1.46(TP-46) U7.9(TP-9)
MWR/: J1.45(TP-45) U7.10(TP-10)
N00036_6360: L6.2(TP-2) R3.1(TP-1) R4.1(TP-1) U1.5(TP-5) U1.8(TP-8) U6.5(TP-5)
N00038_6372: C21.1(TP-1) L3.2(TP-2) U1.4(TP-4)
N00044_6366: U6.1(TP-1) U23.2(TP-2)
N00046_6362: R4.2(TP-2) U6.8(TP-8)
N00048_6359: R3.2(TP-2) U6.2(TP-2)
N00060_6368: U1.6(TP-6) U23.3(TP-3)
OUTA: L1.1(TP-1) U23.6(TP-6)
OUTC: L4.1(TP-1) U22.6(TP-6)
RA0: U3.5(TP-5) U4.5(TP-5) U8.5(TP-5) U9.5(TP-5) U10.5(TP-5) U11.5(TP-5) U12.5(TP-5) U13.5(TP-5) U16.58(TP-58)
RA1: U3.4(TP-4) U4.4(TP-4) U8.4(TP-4) U9.4(TP-4) U10.4(TP-4) U11.4(TP-4) U12.4(TP-4) U13.4(TP-4) U16.60(TP-60)
RA2: U3.3(TP-3) U4.3(TP-3) U8.3(TP-3) U9.3(TP-3) U10.3(TP-3) U11.3(TP-3) U12.3(TP-3) U13.3(TP-3) U16.61(TP-61)
RA3: U3.2(TP-2) U4.2(TP-2) U8.2(TP-2) U9.2(TP-2) U10.2(TP-2) U11.2(TP-2) U12.2(TP-2) U13.2(TP-2) U16.62(TP-62)
RA4: U3.32(TP-32) U4.32(TP-32) U8.32(TP-32) U9.32(TP-32) U10.32(TP-32) U11.32(TP-32) U12.32(TP-32) U13.32(TP-32) U16.63(TP-63)
RA5: U3.31(TP-31) U4.31(TP-31) U8.31(TP-31) U9.31(TP-31) U10.31(TP-31) U11.31(TP-31) U12.31(TP-31) U13.31(TP-31) U16.64(TP-64)
RA6: U3.30(TP-30) U4.30(TP-30) U8.30(TP-30) U9.30(TP-30) U10.30(TP-30) U11.30(TP-30) U12.30(TP-30) U13.30(TP-30) U16.65(TP-65)
RA7: U3.29(TP-29) U4.29(TP-29) U8.29(TP-29) U9.29(TP-29) U10.29(TP-29) U11.29(TP-29) U12.29(TP-29) U13.29(TP-29) U16.66(TP-66)
RA8: U3.28(TP-28) U4.28(TP-28) U8.28(TP-28) U9.28(TP-28) U10.28(TP-28) U11.28(TP-28) U12.28(TP-28) U13.28(TP-28) U16.67(TP-67)
RA9: U3.22(TP-22) U4.22(TP-22) U8.22(TP-22) U9.22(TP-22) U10.22(TP-22) U11.22(TP-22) U12.22(TP-22) U13.22(TP-22) U16.69(TP-69)
RA10: U3.21(TP-21) U4.21(TP-21) U8.21(TP-21) U9.21(TP-21) U10.21(TP-21) U11.21(TP-21) U12.21(TP-21) U13.21(TP-21) U16.70(TP-70)
RA11: U3.20(TP-20) U4.20(TP-20) U8.20(TP-20) U9.20(TP-20) U10.20(TP-20) U11.20(TP-20) U12.20(TP-20) U13.20(TP-20) U16.71(TP-71)
RA12: U3.19(TP-19) U4.19(TP-19) U8.19(TP-19) U9.19(TP-19) U10.19(TP-19) U11.19(TP-19) U12.19(TP-19) U13.19(TP-19) U16.76(TP-76)
RA13: U3.18(TP-18) U4.18(TP-18) U8.18(TP-18) U9.18(TP-18) U10.18(TP-18) U11.18(TP-18) U12.18(TP-18) U13.18(TP-18) U16.77(TP-77)
RA14: U3.15(TP-15) U4.15(TP-15) U8.15(TP-15) U9.15(TP-15) U10.15(TP-15) U11.15(TP-15) U12.15(TP-15) U13.15(TP-15) U16.78(TP-78)
RA15: U3.14(TP-14) U4.14(TP-14) U8.14(TP-14) U9.14(TP-14) U10.14(TP-14) U11.14(TP-14) U12.14(TP-14) U13.14(TP-14) U16.79(TP-79)
RD0: U4.26(TP-26) U8.26(TP-26) U9.26(TP-26) U10.26(TP-26) U16.81(TP-81)
RD1: U4.23(TP-23) U8.23(TP-23) U9.23(TP-23) U10.23(TP-23) U16.82(TP-82)
RD2: U4.10(TP-10) U8.10(TP-10) U9.10(TP-10) U10.10(TP-10) U16.83(TP-83)
RD3: U4.7(TP-7) U8.7(TP-7) U9.7(TP-7) U10.7(TP-7) U16.84(TP-84)
RD4: U3.26(TP-26) U11.26(TP-26) U12.26(TP-26) U13.26(TP-26) U16.1(TP-1)
RD5: U3.23(TP-23) U11.23(TP-23) U12.23(TP-23) U13.23(TP-23) U16.2(TP-2)
RD6: U3.10(TP-10) U11.10(TP-10) U12.10(TP-10) U13.10(TP-10) U16.3(TP-3)
RD7: U3.7(TP-7) U11.7(TP-7) U12.7(TP-7) U13.7(TP-7) U16.4(TP-4)
RDY/: J1.50(TP-50) U7.22(TP-22)
RESET/: J1.53(TP-53) U16.15(TP-15)
SEL: U7.23(TP-23) U16.13(TP-13)
V+12: C1.1(TP-1) C6.1(TP-1) J1.63(TP-63) J1.64(TP-64) U5.4(TP-4) U6.4(TP-4) U22.7(TP-7) U23.7(TP-7)
VCLKA: U1.11(TP-11) U2.11(TP-11) U15.11(TP-11) U16.34(TP-34)
VCLKC: R11.2(TP-2) U17.11(TP-11)
VD0: R7.2(TP-2) U14.2(TP-2) U15.2(TP-2) U16.39(TP-39) U17.2(TP-2)
VD1: R13.2(TP-2) U14.3(TP-3) U15.3(TP-3) U16.40(TP-40) U17.3(TP-3)
VD2: R14.2(TP-2) U14.4(TP-4) U15.4(TP-4) U16.41(TP-41) U17.4(TP-4)
VD3: R15.2(TP-2) U14.5(TP-5) U15.5(TP-5) U16.42(TP-42) U17.5(TP-5)
VD4: R9.2(TP-2) U14.6(TP-6) U15.6(TP-6) U16.43(TP-43) U17.6(TP-6)
VD5: R8.2(TP-2) U14.7(TP-7) U15.7(TP-7) U16.44(TP-44) U17.7(TP-7)
VD6: R10.2(TP-2) U14.8(TP-8) U15.8(TP-8) U16.45(TP-45) U17.8(TP-8)
VD7: R16.2(TP-2) U14.9(TP-9) U15.9(TP-9) U16.46(TP-46) U17.9(TP-9)
WAIT/: J1.51(TP-51) U16.33(TP-33)
WSTAT/: U14.11(TP-11) U16.56(TP-56)
N00036: L2.2(TP-2) R5.1(TP-1) R6.1(TP-1) U2.5(TP-5) U2.8(TP-8) U5.5(TP-5)
N00038: C22.1(TP-1) L5.2(TP-2) U2.4(TP-4)
N00044: U5.1(TP-1) U22.2(TP-2)
N00046: R5.2(TP-2) U5.8(TP-8)
N00048: R6.2(TP-2) U5.2(TP-2)
N00060: U2.6(TP-6) U22.3(TP-3)
N00306: U1.12(TP-12) U15.19(TP-19)
N00318: U1.15(TP-15) U15.16(TP-16)
N00322: U1.16(TP-16) U15.15(TP-15)
N00671: C19.1(TP-1) R16.1(TP-1)
N00689: C5.1(TP-1) R10.1(TP-1)
N00703: C8.1(TP-1) R8.1(TP-1)
N00717: C16.1(TP-1) R9.1(TP-1)
N00827: C17.1(TP-1) R15.1(TP-1)
N00831: C20.1(TP-1) R14.1(TP-1)
N00835: C24.1(TP-1) R13.1(TP-1)
N00837: C7.1(TP-1) R7.1(TP-1)
N04966: L3.1(TP-1) L5.1(TP-1)
N05690: U2.12(TP-12) U17.19(TP-19)
N05692: U2.18(TP-18) U17.13(TP-13)
N05694: U2.13(TP-13) U17.18(TP-18)
N05696: U2.19(TP-19) U17.12(TP-12)
N05698: U2.17(TP-17) U17.14(TP-14)
N05700: U2.14(TP-14) U17.17(TP-17)
N05702: U2.15(TP-15) U17.16(TP-16)
N05704: U2.16(TP-16) U17.15(TP-15)
N11940: U1.13(TP-13) U15.18(TP-18)
N11950: U1.14(TP-14) U15.17(TP-17)
N11984: U1.17(TP-17) U15.14(TP-14)
N11994: U1.18(TP-18) U15.13(TP-13)
N12004: U1.19(TP-19) U15.12(TP-12)
N19706: R1.1(TP-1) U14.18(TP-18)
N19710: R2.1(TP-1) U14.16(TP-16)
N19714: R17.1(TP-1) U14.14(TP-14)
N19718: R12.1(TP-1) U14.12(TP-12)
N19934: D4.2(TP-2) R12.2(TP-2)
N19938: D3.2(TP-2) R17.2(TP-2)
N19942: D1.2(TP-2) R2.2(TP-2)
N23417: U10.6(TP-6) U13.6(TP-6) U16.48(TP-48)
N23878: R11.1(TP-1) U16.36(TP-36)
N24816: U16.14(TP-14) U18.1(TP-1)
N24821: U16.10(TP-10) U18.2(TP-2)
N24826: U16.11(TP-11) U18.3(TP-3) U18.4(TP-4)
N84247: U19.9(TP-9) U20.22(TP-22) U21.9(TP-9) U21.12(TP-12)
N103899: U19.8(TP-8) U19.12(TP-12) U20.19(TP-19) U20.23(TP-23) U21.8(TP-8) U21.11(TP-11)
N255822: D2.2(TP-2) R1.2(TP-2)
N314771: U3.6(TP-6) U4.6(TP-6) U16.51(TP-51)
N315146: U9.6(TP-6) U11.6(TP-6) U16.50(TP-50)
N315333: U8.6(TP-6) U12.6(TP-6) U16.49(TP-49)
N320476: U3.11(TP-11) U4.11(TP-11) U8.11(TP-11) U9.11(TP-11) U10.11(TP-11) U11.11(TP-11) U12.11(TP-11) U13.11(TP-11) U16.57(TP-57)
N336036: C23.1(TP-1) J2.1(TP-1) L1.2(TP-2)
N336041: C18.1(TP-1) J3.1(TP-1) L4.2(TP-2)

Pads without a net: J1 12 48 49 65 66; J2 3 4; J3 3 4; MTH1 1; MTH2 1; MTH3 1; U3 1 8 9 12 13 16 17 24 25; U4 1 8 9 12 13 16 17 24 25; U7 7; U8 1 8 9 12 13 16 17 24 25; U9 1 8 9 12 13 16 17 24 25; U10 1 8 9 12 13 16 17 24 25; U11 1 8 9 12 13 16 17 24 25; U12 1 8 9 12 13 16 17 24 25; U13 1 8 9 12 13 16 17 24 25; U14 13 15 17 19; U16 5 26 27 32 35 37 38 47 55 59 68; U18 5 6 7 8; U19 11; U20 20; U22 1 5 8; U23 1 5 8; U25 1 2 3 4 5 6 7 8 9 11 12 13 14 15 16 17 18 19

## Via types
v1: diameter 0.61, hole 0.33, TOP to BOTTOM, 52 vias
v2: diameter 1.016, hole 0.457, TOP to BOTTOM, 248 vias

## Routing (per net, layer and track width the routed paths; a pad name or vN(x,y) marks a point on that pad's centre or on a via; arc(x,y) is an arc through that point)
AGND: length 38.4
  TOP w0.381: 82.55,34.92 v2(84.67,34.92) ; U2.3 v2(84.67,29.84) ; v2(110.07,35.56) U5.3 ; U1.3 v2(84.67,12.7) ; v2(84.67,17.78) U1.7 ; v2(84.67,38.73) U2.10 ; v2(84.67,21.59) U1.10 ; U6.3 v2(110.07,13.97)
  GND w0.381: 5.23,17.78 J1.1 ; J1.1 7.47,17.78 ; J1.1 6.35,16.66 ; J1.1 6.35,18.9 ; 5.23,20.32 J1.2 ; J1.2 6.35,21.44 ; J1.2 7.47,20.32 ; J1.2 6.35,19.2 ; J1.33 11.43,18.9 ; J1.33 11.43,16.66 ; J1.33 12.55,17.78 ; J1.33 10.31,17.78
  BOTTOM w0.381: v2(80.22,31.12) 80.12,31.22 C22.2 ; C1.2 107.44,31.45 v2(107.53,31.54) ; C21.2 v2(78.11,20.11) ; v2(106.89,9.31) 106.81,9.23 C6.2
GND: length 195.2
  TOP w0.381: v2(32.6,50.16) U21.4 ; U21.45 v2(18.84,50.16) ; v2(85.09,111.97) U9.27 ; v2(109.22,98) U3.27 ; U19.39 v2(18.84,77.47) ; U21.28 v2(18.84,60.96) ; U20.21 v2(32.6,36.2) ; v2(54.4,38.73) U17.1 ; U19.1 v2(32.6,71.75) ; v2(109.22,111.97) U4.27 ; U16.75 v2(64.77,111.97) ; U13.27 v2(85.09,98) ; v2(18.84,73.66) U19.45 ; v2(18.84,25.4) 19.97,25.4 20.01,25.44 19.84,25.44 19.49,25.79 19.49,26.28 19.84,26.63 22.32,26.63 22.67,26.28 22.67,25.79 22.32,25.44 20.63,25.44 20.67,25.4 U20.45 ; v2(18.84,71.75) U19.48 ; U16.74 68.5,108.08 v2(68.58,108.16) ; v2(32.6,57.15) U21.15 ; v2(54.4,27.3) U17.10 ; U10.27 v2(109.22,84.03) ; v2(64.77,78.95) U16.53 ; U20.28 v2(18.84,36.2) ; v2(85.09,84.03) U8.27 ; v2(70.91,10.16) U1.20 ; v2(32.6,60.96) U21.21 ; v2(84.67,27.3) U2.1 ; v2(32.6,73.66) U19.4 ; U14.10 v2(54.4,44.45) ; U20.24 v2(32.6,38.1) ; v2(32.6,77.47) U19.10 ; v2(32.6,84.45) U19.21 ; U20.34 v2(18.84,32.38) ; U20.15 v2(32.6,32.38) ; U21.34 v2(18.84,57.15) ; v2(109.22,70.06) U11.27 ; U20.10 v2(32.6,29.21) ; U20.39 v2(18.84,29.21) ; U1.1 v2(84.67,10.16) ; v2(32.6,53.98) 30.48,53.98 ; U2.20 v2(70.91,27.3) ; v2(54.4,21.59) U15.1 ; U19.28 v2(18.84,84.45) ; v2(35.56,101.81) 35.64,101.73 U16.17 ; U12.27 v2(85.09,70.06) ; U21.48 v2(18.84,48.26) ; U20.4 v2(32.6,25.4) ; U21.1 v2(32.6,48.26) ; U14.1 v2(54.4,55.88) ; U19.34 v2(18.84,80.64) ; 21.08,53.98 v2(18.84,53.98) ; U20.25 v2(18.84,38.1) ; v2(54.4,10.16) U15.10 ; v2(50.38,73.02) U25.10 ; v2(32.6,80.64) U19.15
  GND w0.381: J1.36 12.55,25.4 ; J1.36 10.31,25.4 ; J1.36 11.43,26.52 ; J1.36 11.43,24.28 ; J1.34 12.55,20.32 ; J1.34 11.43,21.44 ; J1.34 10.31,20.32 ; 5.23,22.86 J1.3 ; J1.3 6.35,23.98 ; J1.3 7.47,22.86 ; 40,24.79 U7.12 ; U7.12 40,27.28 ; U7.12 38.76,26.03 ; U7.12 41.25,26.03 ; J1.35 12.55,22.86 ; J1.35 11.43,23.98 ; J1.35 11.43,21.74 ; J1.35 10.31,22.86 ; 40,27.33 U7.11 ; U7.11 38.76,28.58 ; U7.11 41.25,28.58 ; 47.62,24.79 U7.13 ; U7.13 46.38,26.03 ; U7.13 48.87,26.03
  BOTTOM w0.381: C7.2 40.41,23.27 v2(40.43,23.28) ; v2(109.43,66.04) 109.43,66.89 109.35,66.98 C14.2 ; v2(85.94,107.95) 85.94,108.8 85.85,108.89 C25.2 ; C12.2 109.35,80.95 109.43,80.86 v2(109.43,80.01) ; v2(109.43,93.98) 109.43,94.83 109.35,94.92 C13.2 ; v2(23.92,46.14) 24,46.06 C11.2 ; 85.22,81.91 85.22,80.95 85.3,80.86 v2(85.3,80.01) ; 85.22,67.95 85.22,66.98 85.3,66.89 v2(85.3,66.04) ; C20.2 v2(38.73,16.51) ; v2(23.92,91.23) 24,91.14 C9.2 ; v2(70.91,10.16) 70.91,7.62 C3.2 ; v2(23.92,21.38) 24,21.29 C15.2 ; C8.2 v2(38.73,8.89) ; C24.2 v2(38.73,19.05) ; v2(38.73,11.43) C16.2 ; C2.2 74.4,22.75 v2(74.3,22.65) ; v2(38.73,13.97) C17.2 ; C10.2 24,68.92 v2(23.92,69) ; C4.2 109.35,108.89 109.43,108.8 v2(109.43,107.95) ; C5.2 v2(38.73,6.35) 38.73,3.81 C19.2 ; v2(85.3,93.98) 85.3,94.83 85.22,94.92 85.22,95.89
GND_EARTH: length 14.6
  GND w0.381: 111.88,17.78 J2.2 ; J2.2 113.03,18.93 ; J2.2 114.18,17.78 ; J2.2 113.03,16.63 ; 113.03,36.95 J3.2 ; J3.2 113.03,39.25 ; J3.2 114.18,38.1 ; J3.2 111.88,38.1
  BOTTOM w0.381: C23.2 v2(117.9,24.13) ; C18.2 v2(117.9,26.67)
V12N: length 92.7
  TOP w0.381: U6.7 104.78,12.7 105.41,12.07 105.41,4.45 101.6,0.63 95.25,0.63 93.98,1.91 93.98,8.89 88.27,14.61 88.27,17.3 88.65,17.68 U23.4 ; U5.7 99.44,34.29 98.42,35.31 98.42,36.83 95.89,39.37 93,39.37 92.18,38.55 U22.4 90.99,37.36 90.17,36.54 90.17,31.75 91.44,30.48 91.44,28.96 91.06,28.58 90.81,28.58 88.27,26.03 88.27,24.77 88.9,24.13 92.08,24.13 92.71,23.49 92.71,20.7 92.33,20.32 v1(90.81,20.32) ; J1.32 J1.31
  BOTTOM w0.381: v1(90.81,20.32) 90.81,19.05 U23.4
VCC: length 121.1
  TOP w0.381: U14.20 v2(67.1,55.88) ; v2(18.84,27.3) U20.42 ; U21.18 v2(32.6,59.05) ; U1.2 v2(84.67,11.43) ; U25.20 v2(37.68,61.59) ; v2(63.5,78.95) U16.52 ; U21.31 v2(18.84,59.05) ; v2(58.42,111.97) U16.80 ; v2(32.6,34.29) U20.18 ; v2(18.84,75.56) U19.42 ; U17.20 v2(68.16,38.73) ; v2(68.58,105.62) 68.5,105.54 66.55,105.54 ; v2(35.56,103.08) 35.64,103 U16.16 ; U2.2 v2(84.67,28.58) ; v2(18.84,52.07) U21.42 ; v2(84.67,20.32) U1.9 ; U19.18 v2(32.6,82.55) ; U20.31 v2(18.84,34.29) ; v2(84.67,37.46) 82.55,37.46 ; U19.31 v2(18.84,82.55) ; U20.7 v2(32.6,27.3) ; U15.20 v2(68.16,21.59) ; U21.7 v2(32.6,52.07) ; U19.7 v2(32.6,75.56)
  POWER w0.381: U7.24 47.62,55.22 ; U7.24 46.38,53.98 ; U7.24 48.87,53.98 ; 108.59,47.11 D3.1 ; D3.1 109.73,48.26 ; D3.1 107.44,48.26 ; D3.1 108.59,49.41 ; J1.29 7.47,88.9 ; J1.29 5.23,88.9 ; J1.29 6.35,87.78 ; J1.29 6.35,90.02 ; L2.1 91.34,29.84 ; L2.1 90.17,28.67 ; L2.1 90.17,31.02 ; L2.1 89,29.84 ; 11.43,90.32 J1.62 ; J1.62 10.31,91.44 ; J1.62 12.55,91.44 ; J1.62 11.43,92.56 ; 90.17,1.37 L6.1 ; L6.1 91.34,2.54 ; L6.1 90.17,3.71 ; L6.1 89,2.54 ; 117.48,44.57 D4.1 ; D4.1 117.48,46.87 ; D4.1 116.33,45.72 ; D4.1 118.62,45.72 ; J1.30 7.47,91.44 ; J1.30 6.35,92.56 ; J1.30 6.35,90.32 ; J1.30 5.23,91.44 ; D2.1 93.34,54.49 ; D2.1 92.2,53.34 ; D2.1 94.49,53.34 ; D2.1 93.34,52.19 ; D1.1 102.11,50.8 ; D1.1 100.97,51.95 ; D1.1 99.82,50.8 ; D1.1 100.97,49.65
  BOTTOM w0.381: v2(27.3,46.14) C11.1 ; C14.1 v2(106.05,69.64) ; v2(79.38,26.88) C2.1 ; v2(81.92,83.61) C27.1 ; v2(106.05,111.55) C4.1 ; v2(27.3,21.38) C15.1 ; v2(27.3,69) C10.1 ; v2(82.55,111.76) C25.1 ; v2(106.05,97.58) C13.1 ; v2(27.3,91.23) C9.1 ; C26.1 v2(81.92,97.58) ; v2(106.05,83.61) C12.1 ; C3.1 v2(79.38,9.74) ; C28.1 v2(81.92,69.64)
A0: length 14.1
  TOP w0.203: U19.47 22.66,72.39 22.86,72.19 22.86,71.82 21.98,70.94 18.5,70.94 18.32,71.12 J1.54
A1: length 10.1
  TOP w0.203: U19.46 19.35,73.02 19.18,72.85 12.24,72.85 J1.55
A3: length 11.4
  TOP w0.203: U19.43 19.58,74.93 19.54,74.88 19.31,74.88 19.18,74.75 18.5,74.75 18.03,75.23 18.03,75.32 14.6,78.74 J1.57
A5: length 13.1
  TOP w0.203: J1.59 12.2,83.05 12.2,82.41 17.96,76.66 19.18,76.66 19.35,76.83 U19.40
A6: length 14
  TOP w0.203: U19.38 19.35,78.11 19.18,78.28 18.24,78.28 12.52,84 12.52,84.27 11.88,84.91 11.61,84.91 11.43,85.09 J1.60
A7: length 17.6
  TOP w0.203: U19.37 19.05,78.74 17.78,80.01 17.78,86.36 15.24,88.9 J1.61
A18: length 24.7
  TOP w0.203: v1(23.49,32.38) 22.86,33.02 U20.33
  BOTTOM w0.203: v1(23.49,32.38) 24.77,33.66 24.77,34.29 26.67,36.2 26.67,38.73 29.21,41.27 U7.6
A19: length 24.6
  TOP w0.203: U20.32 v1(23.49,33.66)
  BOTTOM w0.203: U7.5 31.11,43.81 26.04,38.73 26.04,36.2 v1(23.49,33.66)
A20: length 25
  TOP w0.203: U20.30 v1(23.49,34.92)
  BOTTOM w0.203: v1(23.49,34.92) 25.4,36.83 25.4,39.17 25.6,39.37 26.04,39.37 31.75,45.09 33.02,45.09 34.29,46.35 U7.4
A21: length 26.3
  TOP w0.203: U20.29 22.86,35.56 v1(23.49,36.2)
  BOTTOM w0.203: v1(23.49,36.2) 24.77,37.46 24.77,39.8 24.97,40 26.04,40 31.11,45.09 31.11,45.52 31.32,45.72 33.02,45.72 34.92,47.62 34.92,48.06 35.76,48.89 U7.3
A22: length 29.1
  TOP w0.203: v1(23.49,37.46) 22.86,36.83 U20.27
  BOTTOM w0.203: v1(23.49,37.46) 23.49,40.44 23.7,40.64 26.04,40.64 30.48,45.09 30.48,46.15 30.68,46.35 33.02,46.35 34.29,47.62 34.29,50.6 35.13,51.43 U7.2
A23: length 31.8
  TOP w0.203: U20.26 22.58,37.46 23.49,38.38 v1(23.49,41.91)
  BOTTOM w0.203: v1(23.49,41.91) 26.72,41.91 29.84,45.03 29.84,46.79 30.05,46.99 33.02,46.99 33.66,47.62 33.66,52.7 34.92,53.98 U7.1
BA0: length 62.6
  TOP w0.203: U19.2 27.3,72.39 24.13,75.56 24.13,86.82 24.77,87.45 24.77,102.23 36.2,113.66 43.23,113.66 45.72,111.18 U16.6
BA1: length 59.3
  TOP w0.203: U16.7 44.45,111.18 42.6,113.03 36.2,113.03 25.4,102.23 25.4,87.51 24.77,86.88 24.77,75.56 27.3,73.02 U19.3
BA2: length 55.9
  TOP w0.203: U16.8 43.18,111.18 41.73,112.62 36.42,112.62 26.04,102.23 26.04,87.57 25.4,86.94 25.4,75.5 26.61,74.3 U19.5
BA3: length 54.4
  TOP w0.203: U19.6 26.55,74.93 26.04,75.45 26.04,87 28.57,89.53 28.57,92.71 26.67,94.61 26.67,102.23 36.65,112.22 40.87,112.22 41.91,111.18 U16.9
BD0: length 17.8
  TOP w0.203: U19.13 34.29,79.38 35.15,80.24 35.15,89.84 36.88,91.57 U16.25
BD1: length 66
  TOP w0.203: U19.14 28.57,80.01 27.94,79.38 v1(26.67,79.38) ; U16.24 v1(33.78,92.84)
  BOTTOM w0.203: v1(26.67,79.38) 26.67,71.96 26.47,71.75 24.13,71.75 22.86,70.48 14.81,70.48 14.6,70.69 14.6,85.72 15.88,87 29.21,87 31.75,89.53 31.75,90.17 33.78,92.2 v1(33.78,92.84)
BD2: length 71
  TOP w0.203: U19.16 27.94,81.28 v1(27.3,80.64) ; U16.23 v1(33.78,94.11)
  BOTTOM w0.203: v1(33.78,94.11) 33.15,94.11 32.38,93.34 32.38,92.08 31.11,90.8 31.11,89.53 29.21,87.63 15.88,87.63 13.97,85.72 13.97,70.05 14.17,69.85 22.8,69.85 24.07,71.12 27.1,71.12 27.3,71.32 v1(27.3,80.64)
BD3: length 75.1
  TOP w0.203: v1(28.57,81.91) U19.17 ; 37.59,95.38 v1(33.78,95.38)
  BOTTOM w0.203: v1(28.57,81.91) 27.94,81.28 27.94,70.69 27.74,70.48 24.01,70.48 22.74,69.22 13.54,69.22 13.33,69.42 13.33,85.72 15.88,88.27 29.21,88.27 30.48,89.53 30.48,90.8 31.75,92.08 31.75,93.98 33.15,95.38 v1(33.78,95.38)
BD4: length 24.1
  TOP w0.203: U19.19 27.51,83.19 27.3,83.39 27.3,87.63 27.94,88.27 29.21,88.27 29.84,88.9 29.84,91.44 v1(30.48,92.08) ; U16.21 v1(33.78,96.65)
  BOTTOM w0.203: v1(30.48,92.08) 31.11,92.71 31.11,94.61 33.15,96.65 v1(33.78,96.65)
BD5: length 22.9
  TOP w0.203: v1(28.57,83.82) U19.20 ; U16.20 v1(33.78,97.92)
  BOTTOM w0.203: v1(28.57,83.82) 28.57,85.72 34.92,92.08 34.92,96.77 v1(33.78,97.92)
BD6: length 20.5
  TOP w0.203: U16.19 33.67,99.19 33.02,98.54 33.02,90.11 33.4,89.73 33.4,86.51 31.98,85.09 U19.22
BD7: length 21
  TOP w0.203: U19.23 31.98,85.72 32.99,86.74 32.99,89.56 32.38,90.17 32.38,98.48 34.36,100.46 37.59,100.46
BD8: length 50.6
  TOP w0.203: U21.23 35.56,62.23 37.47,60.32 37.47,24.77 36.83,24.13 U20.2
BD10: length 45.8
  TOP w0.203: U20.5 26.04,26.03 25.4,26.67 25.4,30.28 25.04,30.64 25.04,31.33 24.64,31.74 24.64,43.4 25.4,44.16 25.4,46.35 24.13,47.62 24.13,59.05 25.4,60.32 U21.20
BD11: length 43.6
  TOP w0.203: U20.6 26.67,26.67 26.04,27.3 26.04,28.9 25.86,29.07 25.86,30.4 25.45,30.81 25.45,31.5 25.04,31.91 25.04,43.23 25.86,44.04 25.86,46.53 24.77,47.62 24.77,59.05 25.4,59.69 U21.19
BD12: length 39.8
  TOP w0.203: U20.8 27.3,27.94 26.67,28.58 26.67,28.84 26.26,29.24 26.26,30.57 25.86,30.98 25.86,31.67 25.45,32.08 25.45,43.06 26.26,43.87 26.26,46.76 25.4,47.62 25.4,57.78 26.04,58.42 U21.17
BD13: length 39.8
  TOP w0.203: U21.16 26.24,57.78 26.04,57.58 26.04,48.46 26.24,48.26 27.3,48.26 28.4,47.17 28.4,45.43 25.86,42.89 25.86,32.25 26.26,31.84 26.26,31.15 26.67,30.74 26.67,29.41 27.51,28.58 30.48,28.58
BD14: length 35.7
  TOP w0.203: U20.11 28.14,29.84 26.67,31.32 26.67,32.01 26.26,32.42 26.26,42.72 28.8,45.26 28.8,47.4 27.3,48.89 26.87,48.89 26.67,49.1 26.67,56.31 26.87,56.52 U21.14
BD15: length 32.9
  TOP w0.203: U20.12 28.78,30.48 26.67,32.59 26.67,42.55 29.21,45.09 29.21,47.62 27.3,49.53 27.3,55.68 27.51,55.88 U21.13
D0: length 18.8
  TOP w0.203: J1.28 10.16,90.17 12.06,90.17 12.7,89.53 15.88,89.53 18.41,87 18.41,85.93 18.62,85.72 U19.26
D1: length 30.2
  TOP w0.203: J1.27 5.26,84.91 5.26,87.17 5.71,87.63 6.98,87.63 10.16,90.8 10.16,92.08 10.79,92.71 12.06,92.71 12.7,92.08 12.7,90.8 13.33,90.17 16.51,90.17 19.05,87.63 21.52,87.63 22.58,86.57 22.58,85.51 22.16,85.09 U19.27
D6: length 24.3
  TOP w0.203: U20.47 20.01,24.13 14.93,19.05 10.36,19.05 10.16,19.25 10.16,19.69 8.25,21.59 5.28,21.59 5.08,21.79 5.08,25.22 5.26,25.4 J1.4
DDIR: length 32.6
  TOP w0.203: U21.24 32.38,62.86 33.02,63.5 v1(33.66,63.5) ; v1(31.83,87.63) 31.83,86.72 31.47,86.36 U19.24
  BOTTOM w0.203: v1(31.83,87.63) 32.47,88.27 33.45,88.27 33.66,88.06 v1(33.66,63.5)
GAIN: length 62.8
  TOP w0.203: U5.6 104.57,35.56 104.78,35.76 104.78,37.46 105.41,38.1 108.59,38.1 110.49,40 114.3,40 114.94,39.37 114.94,29.21 116.2,27.94 118.11,27.94 120.02,26.03 120.02,23.49 119.38,22.86 117.48,22.86 116.2,21.59 116.2,15.88 110.49,10.16 106.25,10.16 106.05,10.36 106.05,12.4 104.47,13.97 U6.6
MCLK: length 48.1
  TOP w0.203: J1.52 13.33,64.14 31.55,64.14 31.75,64.34 31.75,64.77 33.66,66.67 36.2,66.67 36.83,67.31 36.83,73.02 38.73,74.93 38.73,78.74 35.56,81.91 35.56,83.19 36.2,83.82 37.47,83.82 U16.31
N00036_6360: length 49
  TOP w0.203: v1(88.9,11.43) 85.09,15.24 U1.5 81.76,15.24 81.15,15.85 81.15,18.44 81.76,19.05 U1.8
  BOTTOM w0.203: v1(88.9,11.43) 97.79,11.43 101.6,15.24 v1(102.87,15.24) ; v1(102.87,15.24) 104.14,16.51 R3.1 ; v1(102.87,15.24) R4.1 100.97,13.34 99.06,11.43 99.06,2.74 98.86,2.54 L6.2
N00038_6372: length 19.1
  TOP w0.203: v1(78.11,12.7) 79.38,13.97 U1.4 85.09,13.97 86.36,12.7 86.36,6.99 87,6.35 L3.2
N00044_6366: length 23
  TOP w0.203: U6.1 110.49,11.43 111.12,12.07 111.12,15.24 108.69,17.68 U23.2
N00048_6359: length 7.1
  TOP w0.203: U6.2 107.95,13.34 107.94,13.35 106.81,13.35 105.41,14.75 v1(105.41,15.88)
  BOTTOM w0.203: R3.2 105.41,16.92 v1(105.41,15.88)
N00060_6368: length 12.9
  TOP w0.203: U23.3 93.21,19.19 87.77,19.19 85.09,16.51 U1.6
OUTA: length 10.2
  BOTTOM w0.203: U23.6 91.08,14.07 89.53,15.62 89.53,17.14 89.49,17.19 89.49,21.54 L1.1
OUTC: length 8.6
  TOP w0.203: L4.1 92.18,28.04 U22.6
RA9: length 41.7
  TOP w0.203: U4.22 v1(115.57,111.76)
  BOTTOM w0.203: v1(115.57,111.76) 116.84,113.03 123.83,113.03 125.09,111.76 125.09,94.18 124.26,93.34 116.84,93.34 115.57,94.61 v1(115.57,95.89)
RA10: length 36.1
  TOP w0.203: U4.21 v1(116.84,111.76)
  BOTTOM w0.203: v1(116.84,111.76) 117.48,112.39 122.99,112.39 124.46,110.92 124.46,94.61 123.83,93.98 117.48,93.98 116.84,94.61 v1(116.84,95.89)
RA11: length 35.9
  TOP w0.203: U3.20 118.11,94.18 118.31,93.98 118.54,93.98 118.75,93.78 118.75,92.71 119.38,92.08 121.28,92.08 125.09,95.89 125.09,107.31 123.83,108.58 123.83,111.12 122.56,112.39 118.75,112.39 118.11,111.76 U4.20
RA12: length 29.7
  TOP w0.203: U4.19 119.38,110.64 120.5,111.76 121.92,111.76 123.19,110.49 123.19,108.58 124.46,107.31 124.46,95.89 121.55,92.98 119.75,92.98 119.38,93.34 U3.19
RA13: length 22
  TOP w0.203: U3.18 120.65,94.18 120.85,93.98 121.92,93.98 123.83,95.89 123.83,107.31 123.19,107.95 121.49,107.95 120.65,108.79 U4.18
RA14: length 21.1
  TOP w0.203: U11.15 120.65,57.02 120.79,56.88 122.92,56.88 123.19,57.15 123.19,69.22 122.56,69.85 121.28,69.85 120.65,70.48 U10.15
RA15: length 29.8
  TOP w0.203: U11.14 119.38,57.02 120.52,55.88 123.19,55.88 123.83,56.52 123.83,73.02 122.56,74.3 119.58,74.3 119.38,74.09 U10.14
RD6: length 29.7
  TOP w0.203: U12.10 90.17,55.88 90.81,55.24 113.67,55.24 114.3,55.88 U11.10
RD7: length 29
  TOP w0.203: U12.7 86.36,60.32 87.63,61.59 109.22,61.59 110.49,60.32 U11.7
V+12: length 81
  TOP w0.381: U5.4 110.49,36.83 111.12,36.2 111.12,32.38 108.59,29.84 v1(104.14,29.84) 102.87,29.84 101.6,31.12 95.89,31.12 U22.7 ; 93.98,13.34 93.98,11.42 94.56,10.84 94.56,3.23 96.52,1.27 100.97,1.27 103.51,3.81 v1(103.51,7.62) 103.51,8.89 v1(104.14,9.53) ; J1.64 J1.63
  BOTTOM w0.381: v1(104.14,9.53) 104.78,10.16 104.78,13.97 106.05,15.24 v1(107.95,15.24) 107.95,18.41 104.14,22.23 v1(104.14,29.84)
VD0: length 135.6
  TOP w0.203: 49.53,28.58 52.07,31.12 52.07,34.92 54.61,37.46 U17.2 ; 49.53,28.58 48.89,27.94 48.89,9.53 53.97,4.45 58.42,4.45 62.86,8.89 62.86,15.24 57.78,20.32 U15.2 v1(53.97,20.32) ; 49.53,28.58 49.53,50.8 53.34,54.61 U14.2 57.91,54.61 57.91,54.74 58.42,55.24 58.42,67.95 46.99,79.38 U16.39
  BOTTOM w0.203: v1(53.97,20.32) 52.7,21.59 R7.2
VD1: length 132.2
  TOP w0.203: v1(54.61,19.05) U15.3 57.58,19.05 62.23,14.4 62.23,8.89 58.42,5.08 53.97,5.08 49.53,9.53 49.53,27.94 52.7,31.12 52.7,34.29 54.61,36.2 U17.3 58.01,36.2 58.42,36.6 58.42,39.8 58.22,40 50.37,40 50.17,40.21 50.17,50.16 53.34,53.34 U14.3 58.42,53.34 59.05,53.98 59.05,68.58 48.26,79.38 U16.40
  BOTTOM w0.203: R13.2 v1(54.61,19.05)
VD2: length 129.1
  TOP w0.203: U16.41 49.53,79.38 59.69,69.22 59.69,53.34 58.42,52.07 U14.4 52.7,52.07 50.8,50.16 50.8,40.84 51,40.64 58.48,40.64 59.05,40.06 59.05,36.07 57.91,34.92 55.12,34.92 53.34,33.15 53.34,31.12 50.17,27.94 50.17,9.53 53.97,5.71 58.42,5.71 61.59,8.89 61.59,13.97 57.78,17.78 U15.4 v1(53.97,17.78)
  BOTTOM w0.203: R14.2 52.7,16.51 v1(53.97,17.78)
VD3: length 126.9
  TOP w0.203: U16.42 50.8,79.38 60.33,69.85 60.33,51 60.12,50.8 U14.5 52.7,50.8 51.44,49.53 51.44,41.48 51.64,41.27 58.42,41.27 59.69,40 59.69,35.43 57.91,33.66 U17.5 54.61,33.66 53.97,33.02 53.97,31.12 50.8,27.94 50.8,9.53 53.97,6.35 58.42,6.35 60.96,8.89 60.96,13.34 57.78,16.51 U15.5 55.73,16.51 55.09,15.88 v1(53.97,15.88)
  BOTTOM w0.203: v1(53.97,15.88) 52.07,13.97 R15.2
VD4: length 123.1
  TOP w0.203: U16.43 52.07,79.58 60.96,70.69 60.96,50.8 59.69,49.53 U14.6 52.7,49.53 52.07,48.89 52.07,42.11 52.27,41.91 58.42,41.91 60.33,40 60.33,34.29 58.42,32.38 U17.6 54.81,32.38 54.61,32.18 54.61,31.12 51.44,27.94 51.44,9.53 53.97,6.99 58.42,6.99 60.33,8.89 60.33,12.22 57.3,15.24 U15.6 55.73,15.24 55.09,14.61 v1(53.97,14.61)
  BOTTOM w0.203: R9.2 50.8,11.43 v1(53.97,14.61)
VD5: length 119.3
  TOP w0.203: v1(53.97,13.34) 55.09,13.34 55.73,13.97 U15.7 57.78,13.97 59.69,12.07 59.69,8.89 58.42,7.62 53.97,7.62 51.84,9.75 51.84,27.77 55.02,30.95 55.02,31.02 55.12,31.12 U17.7 58.42,31.12 60.96,33.66 60.96,40 58.42,42.55 52.91,42.55 52.7,42.75 52.7,47.62 53.34,48.26 U14.7 59.05,48.26 61.59,50.8 61.59,71.32 53.34,79.58 U16.44
  BOTTOM w0.203: R8.2 53.97,13.11 v1(53.97,13.34)
VD6: length 115.7
  TOP w0.203: U16.45 54.61,79.58 62.23,71.96 62.23,50.8 58.42,46.99 U14.8 54.61,46.99 53.34,45.72 53.34,43.81 53.97,43.18 58.42,43.18 61.59,40 61.59,33.02 58.42,29.84 U17.8 54.61,29.84 52.25,27.48 52.25,9.98 54.2,8.03 58.19,8.03 59.05,8.89 59.05,11.56 57.91,12.7 U15.8 55.27,12.7 v1(54.61,12.04)
  BOTTOM w0.203: v1(54.61,12.04) 50.52,7.95 50.42,7.95 49.76,7.29 R10.2
VD7: length 106.6
  TOP w0.203: U16.46 55.88,79.58 62.86,72.59 62.86,50.67 57.91,45.72 ; 57.91,45.72 57.91,44.96 62.23,40.64 62.23,32.38 58.42,28.58 U17.9 53.97,28.58 52.7,27.3 52.7,10.16 53.97,8.89 v1(57.78,8.89) 58.22,9.32 58.22,11.13 57.91,11.43 U15.9 ; 57.91,45.72 U14.9
  BOTTOM w0.203: v1(57.78,8.89) 52.7,8.89 51.44,7.62 51.44,5.49 R16.2
WAIT/: length 42.9
  TOP w0.203: U16.33 39.37,74.8 37.47,72.9 37.47,66.88 36.86,66.27 33.88,66.27 32.38,64.77 32.38,63.7 32.18,63.5 J1.51
N00036: length 58.7
  TOP w0.203: 85.73,32.38 87.63,30.48 87.63,22.23 90.17,19.69 93.34,19.69 93.98,20.32 93.98,29.21 94.62,29.84 v1(97.79,29.84) ; 85.73,32.38 U2.5 ; 85.73,32.38 86.36,33.02 86.36,35.56 85.73,36.2 U2.8
  BOTTOM w0.203: R6.1 104.14,36.83 R5.1 v1(102.87,36.83) 102.26,36.83 100.33,34.9 100.33,30.05 100.13,29.84 v1(97.79,29.84)
N00038: length 34
  TOP w0.203: L5.2 90.17,11.43 87,14.61 87,17.14 v1(87.14,17.29)
  BOTTOM w0.203: v1(87.14,17.29) 87.14,29.7 85.73,31.12 v1(82.55,31.12) 80.01,33.66 80.01,35.99 79.81,36.2 C22.1
N00044: length 18.2
  TOP w0.203: U5.1 106.25,33.02 106.05,32.82 106.05,31.95 105.84,31.75 97.99,31.75 97.79,31.95 97.79,36.45 96.88,37.36 U22.2
N00048: length 6.5
  BOTTOM w0.203: R6.2 106.27,34.7 106.68,34.29 v1(107.95,34.29)
N00060: length 14.3
  BOTTOM w0.203: v1(82.55,33.66) 85.09,33.66 90.81,39.37 92.71,39.37 U22.3
N00306: length 7
  TOP w0.203: U15.19 U1.12
N00318: length 7
  TOP w0.203: U15.16 U1.15
N00322: length 7
  TOP w0.203: U15.15 U1.16
N00671: length 5.1
  BOTTOM w0.203: C19.1 R16.1
N00689: length 5.1
  BOTTOM w0.203: C5.1 R10.1
N00703: length 5.1
  BOTTOM w0.203: C8.1 R8.1
N00717: length 5.1
  BOTTOM w0.203: C16.1 R9.1
N00827: length 5.1
  BOTTOM w0.203: C17.1 R15.1
N00831: length 5.1
  BOTTOM w0.203: C20.1 R14.1
N00835: length 5.1
  BOTTOM w0.203: C24.1 R13.1
N00837: length 5.1
  BOTTOM w0.203: R7.1 C7.1
N04966: length 3.8
  TOP w0.203: L5.1 L3.1
N05690: length 7
  TOP w0.203: U17.19 73.03,37.46
N05692: length 7
  TOP w0.203: U2.18 U17.13
N05694: length 7
  TOP w0.203: U17.18 U2.13
N05696: length 7
  TOP w0.203: U2.19 U17.12
N05698: length 7
  TOP w0.203: U17.14 U2.17
N05700: length 7
  TOP w0.203: 66.04,34.92 73.03,34.92
N05702: length 7
  TOP w0.203: U17.16 U2.15
N05704: length 7
  TOP w0.203: U17.15 U2.16
N11940: length 7
  TOP w0.203: U15.18 U1.13
N11950: length 7
  TOP w0.203: U1.14 U15.17
N11984: length 7
  TOP w0.203: U15.14 U1.17
N11994: length 7
  TOP w0.203: U15.13 U1.18
N12004: length 7
  TOP w0.203: U15.12 U1.19
N19706: length 13.2
  TOP w0.203: v1(76.2,53.34) U14.18
  BOTTOM w0.203: R1.1 v1(76.2,53.34)
N19710: length 13.2
  TOP w0.203: v1(75.56,50.8) U14.16
  BOTTOM w0.203: R2.1 v1(75.56,50.8)
N19714: length 13.2
  TOP w0.203: v1(75.56,48.26) U14.14
  BOTTOM w0.203: R17.1 v1(75.56,48.26)
N19718: length 13.2
  TOP w0.203: v1(76.2,45.72) U14.12
  BOTTOM w0.203: R12.1 v1(76.2,45.72)
N23878: length 22.5
  TOP w0.203: U16.36 v1(43.18,58.42)
N24816: length 16.3
  TOP w0.203: U18.1 30.48,94.61 31.75,95.89 31.75,98.42 34.29,100.97 34.29,104.14 35.69,105.54 37.59,105.54
N24821: length 25.1
  TOP w0.203: U16.10 40.64,110.57 39.45,111.76 36.83,111.76 27.3,102.23 27.3,97.79 27.94,97.16 U18.2
N24826: length 17.9
  TOP w0.203: U16.11 39.37,110.57 38.81,111.12 37.06,111.12 29.21,103.28 U18.4 U18.3
N84247: length 28.6
  TOP w0.203: U20.22 27.51,36.83 27.3,37.03 27.3,42.55 29.84,45.09 29.84,46.79 30.05,46.99 33.02,46.99 33.66,47.62 33.66,54.61 33.02,55.24 U21.12
N320476: length 40.6
  TOP w0.203: U10.11 115.57,74.3 116.2,74.93 123.19,74.93 124.46,73.66 124.46,56.52 123.19,55.24 116.84,55.24 115.57,56.52 U11.11
N336036: length 26
  TOP w0.203: v1(113.03,24.13) 112.39,24.13 110.49,22.23 L1.2
  BOTTOM w0.203: J2.1 114.3,16.51 114.3,19.05 113.03,20.32 v1(113.03,24.13)
N336041: length 24.4
  TOP w0.203: L4.2 112.39,26.03 v1(113.03,26.67) J3.1

## Copper pours and planes (outline as drawn; the poured copper is in the pictures)
AGND on GND: 0,21.59 8.89,21.59 8.89,19.05 17.78,19.05 25.4,11.43 29.21,11.43 36.2,4.45 50.17,4.45 52.07,6.35 76.84,6.35 76.84,40.64 87,40.64 87,28.58 82.55,28.58 82.55,24.13 87.63,24.13 87.63,11.43 82.55,11.43 82.55,6.35 104.78,6.35 104.78,38.73 111.12,38.73 111.12,0 21.59,0 21.59,5.08 0,5.08
GND on GND: 21.59,5.08 0,5.08 0,109.22 21.59,109.22 21.59,114.3 123.19,114.3 125.73,111.76 125.73,2.54 123.19,0 21.59,0
GND_EARTH on GND: 111.12,0 123.19,0 125.73,2.54 125.73,45.72 111.12,45.72
VCC on POWER: 21.59,5.08 0,5.08 0,109.22 21.59,109.22 21.59,114.3 123.19,114.3 125.73,111.76 125.73,2.54 123.19,0 21.59,0
